# Altium PCB Tiva Control PCB.PcbDoc
Units mil, origin at the board's own origin, x right, y up, seen from the top; angles counter-clockwise.
Board outline 3135 x 1685 mil, 2 copper layers (Top Layer, Bottom Layer); 83 components, 55 nets, 280 pads, 67 vias.
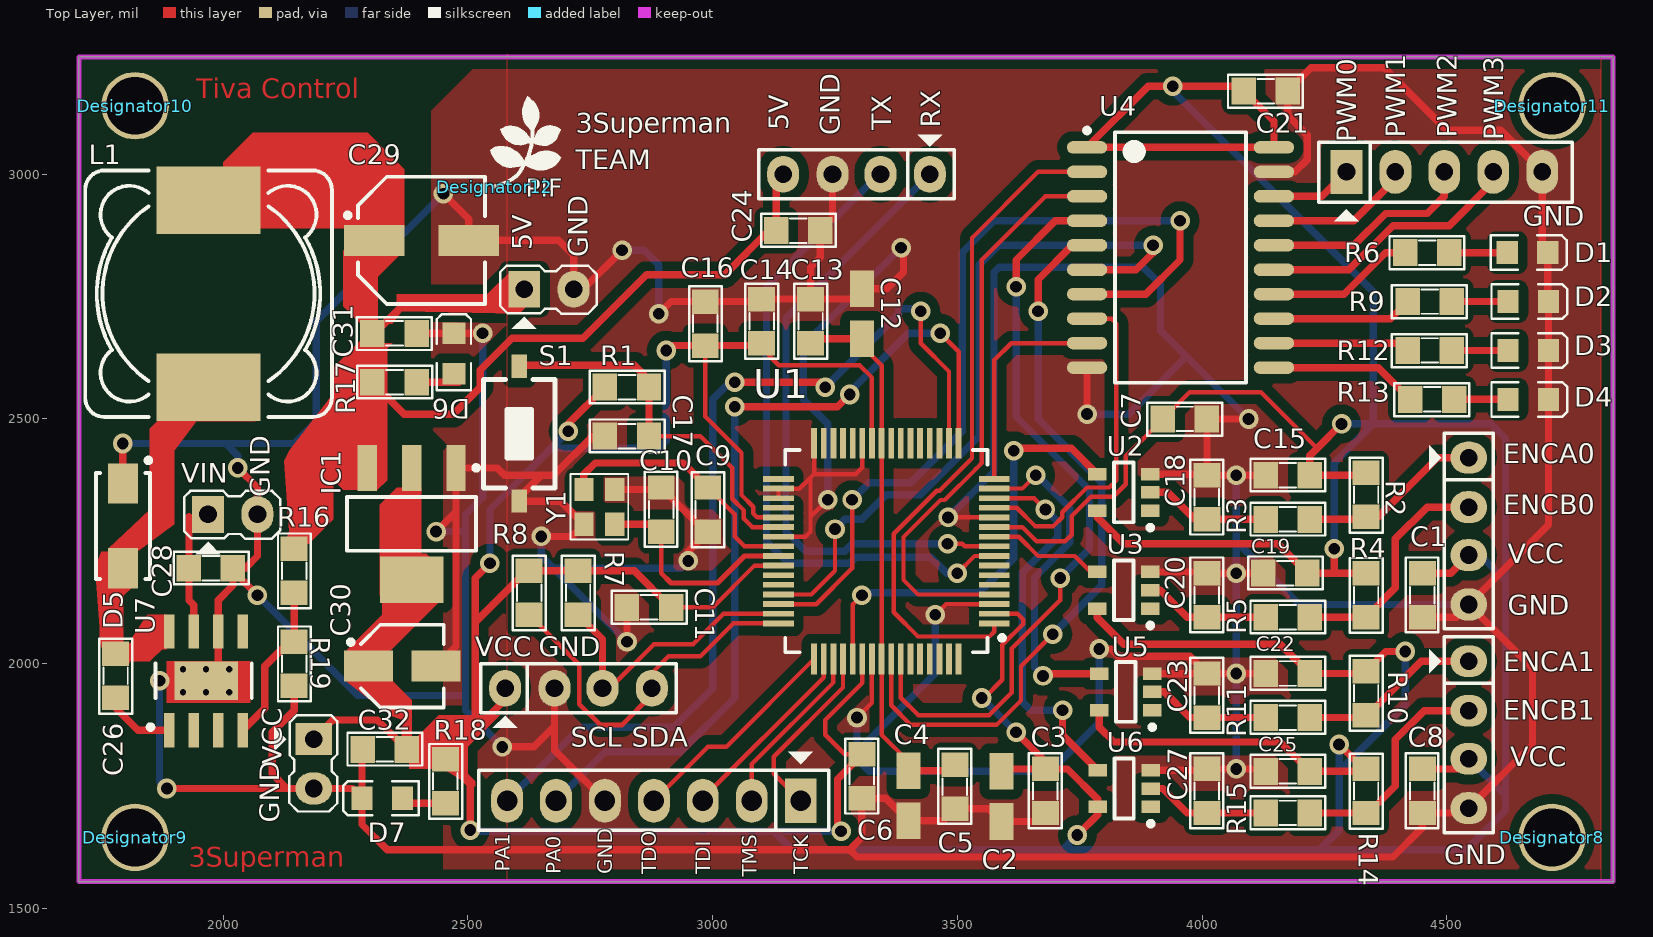
[diagram p0: Top Layer view]
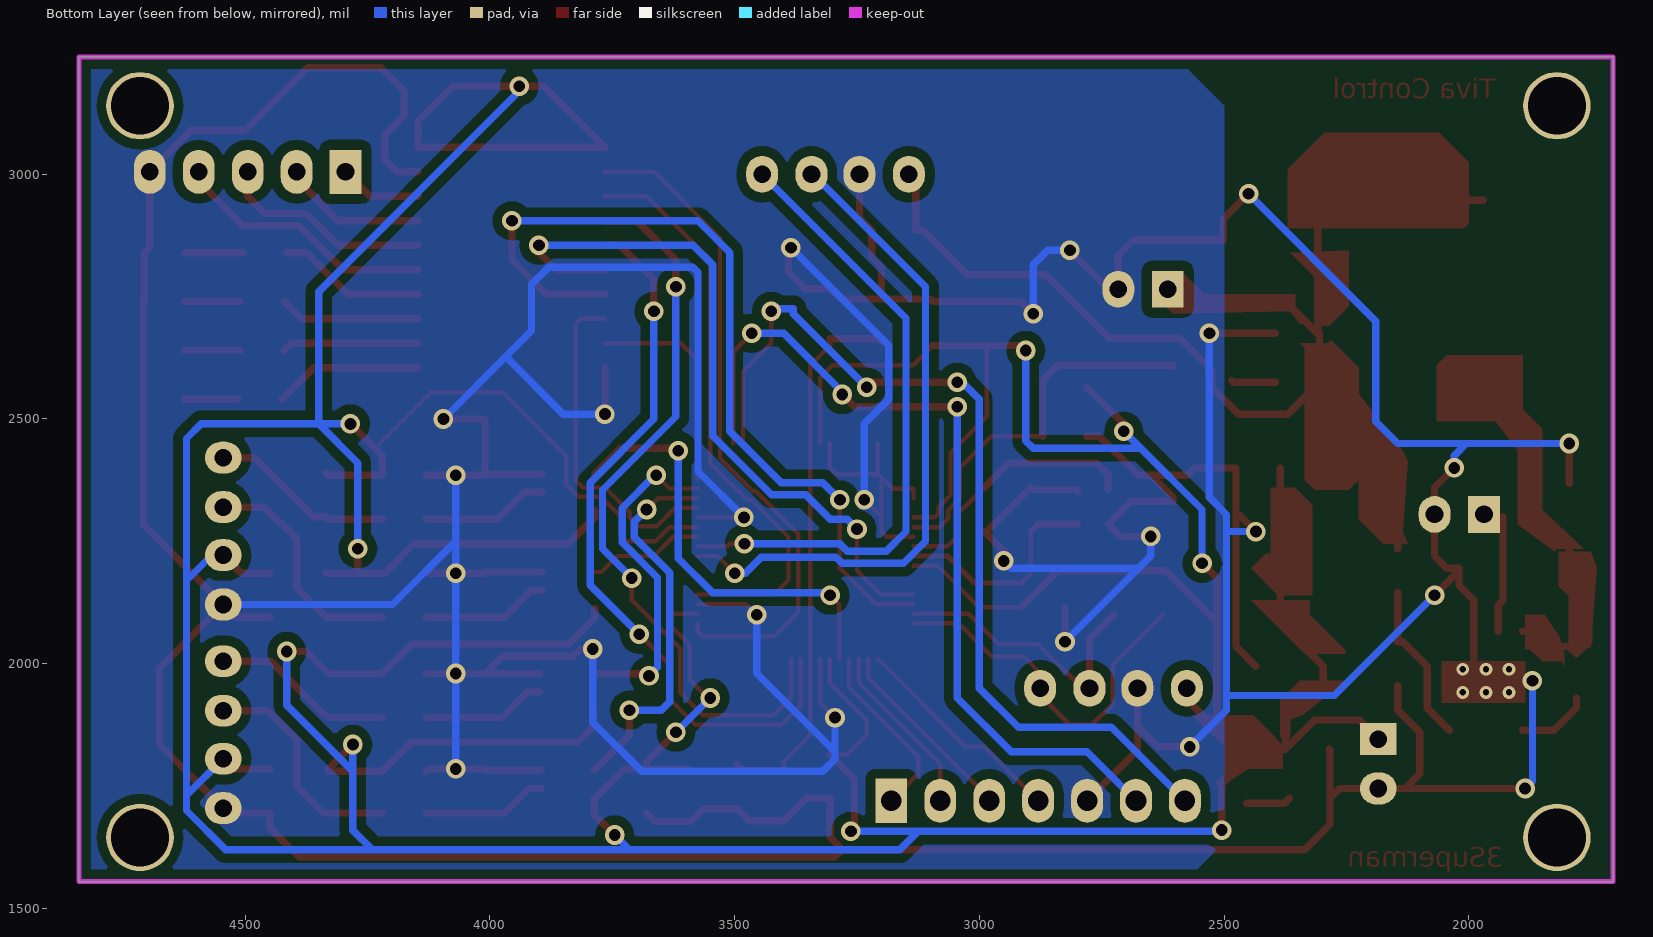
[diagram p1: Bottom Layer view, seen from below]
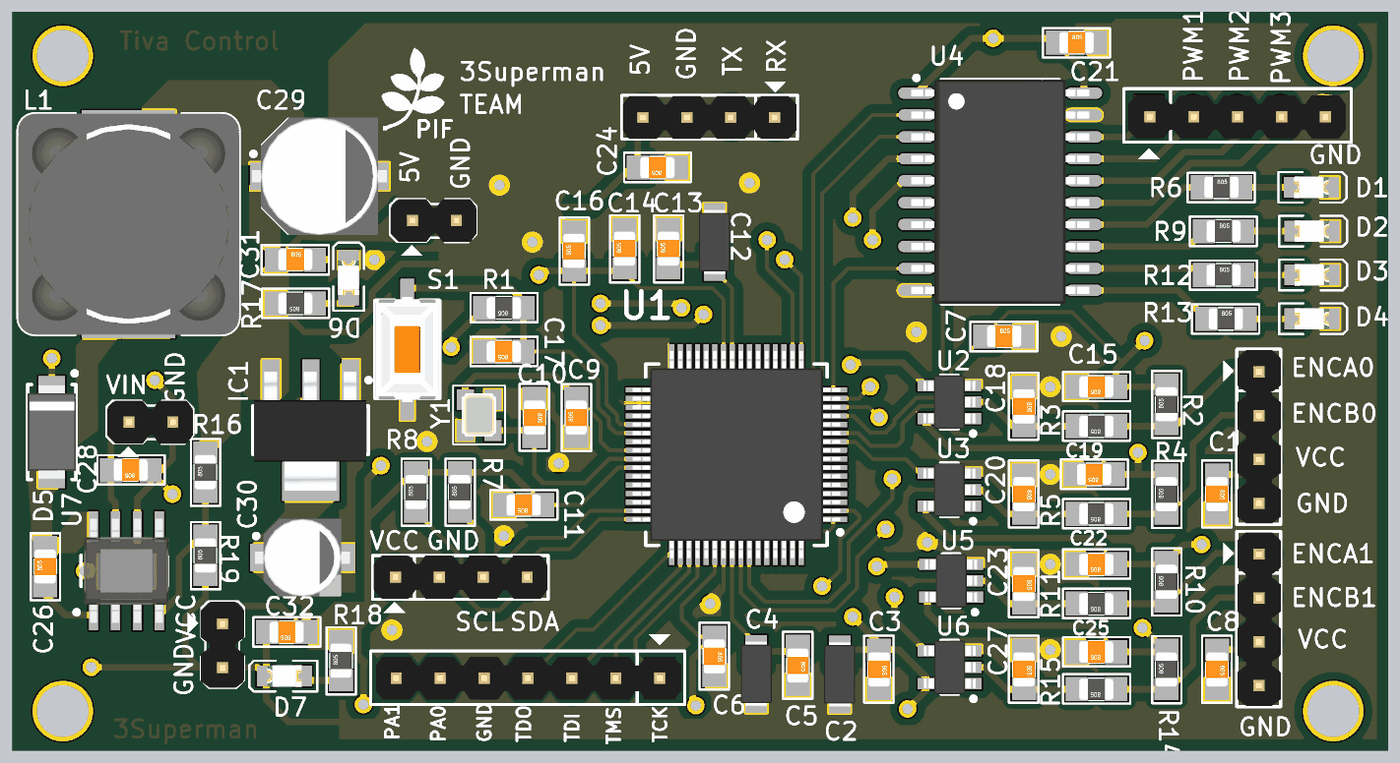
[diagram p2: 3D render of the assembled board from above, using the file's embedded part models]

## Layer stack, top to bottom
Top Solder: solder mask 0.4, Solder Resist, Dk 3.5
Top Layer: signal copper 1.4
Dielectric 1: dielectric 12.6, FR-4, Dk 4.8
Bottom Layer: signal copper 1.4
Bottom Solder: solder mask 0.4, Solder Resist, Dk 3.5

## Board outline
1705,1555 1705,3240 4840,3240 4840,1555

## Design rules (kind name [scope] priority, off if disabled: settings)
Clearance [All] p1: gap=10 ignorepadtopadclearanceinfootprint=FALSE except(0: Arc-Hole Track-Hole SMDPad-Hole THPad-Hole Via-Hole Fill-Hole Poly-Hole Region-Hole Text-Hole; 20: Arc-Poly Arc-Region Track-Poly Track-Region SMDPad-Poly SMDPad-Region THPad-Poly THPad-Region Via-Poly Via-Region Fill-Poly Fill-Region Poly-Poly Poly-Region Region-Region)
PlaneConnect [All] p1: planeconnectstyle=Direct reliefexpansion=20 reliefentries=4 reliefconductorwidth=10 reliefairgap=10
PolygonConnect [All] p1: connectstyle=Direct reliefconductorwidth=10 reliefentries=4 polygonreliefangle="90 Angle" airgapwidth=10
RoutingVias [All] p1: holewidth=50 width=100 viastyle="Through Hole" minholewidth=24 minwidth=40 maxholewidth=24 maxwidth=40
SolderMaskExpansion [All] p1: expansion=4
Width [All] p1: maxlimit=50 minlimit=8 preferedwidth=15 minimp=50.000000 maximp=50.000000 favimp=50.000000
29 further rules are at their usual default settings.

## Classes and differential pairs
component class "Tiva Control": 5V C1 C2 C3 C4 C5 C6 C7 C8 C9 C10 C11 C12 C13 C14 C15 C16 C17 C18 C19 C20 C21 C22 C23 C24 C25 C26 C27 C28 C30 C31 C32 D1 D2 D3 D4 D5 D6 D7 IC1 L1 PA1 PWM0 R1 R2 R3 R4 R5 R6 R7 R8 R9 R10 R11 R12 R13 R14 R15 R16 R17 R18 R19 SCL U1 U3 U4 U5 U6 U7 VCC VIN Y1 ""

## Components (designator, comment, footprint, x,y, rotation, side; value= is the part's Value field where it differs from the comment)
5V "Header 2" JP2 2615,2765 r0 top (schematic designator P8)
5V "Header 4" JP4 3344,3000 r180 top (schematic designator P5)
C1 "Cap Non-Pol SMD" CAP-SM-0805 4450,2185 r270 top value=104
C2 "Capacitors" "CAP TANTALUM SMD-1206" 3590,1728.82 r270 top
C3 "Cap Non-Pol SMD" CAP-SM-0805 3680,1785 r270 top value=104
C4 "Capacitors" "CAP TANTALUM SMD-1206" 3400,1730 r270 top
C5 "Cap Non-Pol SMD" CAP-SM-0805 3495,1793.93 r270 top value=104
C6 "Cap Non-Pol SMD" CAP-SM-0805 3305,1815 r270 top value=104
C7 "Cap Non-Pol SMD" CAP-SM-0805 3920,2500 r0 top value=104
C8 "Cap Non-Pol SMD" CAP-SM-0805 4450,1785 r270 top value=104
C9 "Cap Non-Pol SMD" CAP-SM-0805 2990,2270 r90 top value=10pF
C10 "Cap Non-Pol SMD" CAP-SM-0805 2895,2360 r270 top value=10pF
C11 "Cap Non-Pol SMD" CAP-SM-0805 2915,2115 r180 top value=104
C12 "Capacitors" "CAP TANTALUM SMD-1206" 3305,2715 r90 top
C13 "Cap Non-Pol SMD" CAP-SM-0805 3200,2655 r90 top value=104
C14 "Cap Non-Pol SMD" CAP-SM-0805 3100,2655 r90 top value=104
C15 "Cap Non-Pol SMD" CAP-SM-0805 4220,2385 r180 top value=104
C16 "Cap Non-Pol SMD" CAP-SM-0805 2985,2650 r90 top value=104
C17 "Cap Non-Pol SMD" CAP-SM-0805 2870,2465 r180 top value=104
C18 "Cap Non-Pol SMD" CAP-SM-0805 4010,2385 r270 top value=104
C19 "Cap Non-Pol SMD" CAP-SM-0805 4215,2185 r180 top value=104
C20 "Cap Non-Pol SMD" CAP-SM-0805 4010,2185 r270 top value=104
C21 "Cap Non-Pol SMD" CAP-SM-0805 4085,3170 r0 top value=104
C22 "Cap Non-Pol SMD" CAP-SM-0805 4220,1980 r180 top value=104
C23 "Cap Non-Pol SMD" CAP-SM-0805 4010,1980 r270 top value=104
C24 "Cap Non-Pol SMD" CAP-SM-0805 3220,2885 r180 top value=104
C25 "Cap Non-Pol SMD" CAP-SM-0805 4220,1780 r180 top value=104
C26 "Cap Non-Pol SMD" CAP-SM-0805 1780,1930 r90 top value=0.01u
C27 "Cap Non-Pol SMD" CAP-SM-0805 4010,1785 r270 top value=104
C28 "Cap Non-Pol SMD" CAP-SM-0805 2020,2195 r180 top value=10uF
C29 "Cap Pol SMD" "CAP ALU SIZE D" 2405,2865 r0 top value=220uF
C30 "Cap Pol SMD" "CAP ALU SIZE B" 2366.1,1995 r0 top value=22uF
C31 "Cap Non-Pol SMD" CAP-SM-0805 2305,2675 r0 top value=104
C32 "Cap Non-Pol SMD" CAP-SM-0805 2375,1825 r180 top value=104
D1 "LED SMD" LED_0805_Blue 4665,2840 r0 top
D2 "LED SMD" LED_0805_Blue 4666.34,2740 r0 top
D3 "LED SMD" LED_0805_Blue 4666.34,2640 r0 top
D4 "LED SMD" LED_0805_Blue 4666.34,2540 r0 top
D5 "SS34" SS34 1795,2281.61 r270 top
D6 "LED SMD" LED_0805_Blue 2471.34,2633.66 r90 top
D7 "LED SMD" LED_0805_Blue 2325,1725 r180 top
Designator8 "Comment" "LO KHOAN 3MM" 4715,1645 r0 top
Designator9 "Comment" "LO KHOAN 3MM" 1820,1645 r0 top
Designator10 "Comment" "LO KHOAN 3MM" 1820,3140 r0 top
Designator11 "Comment" "LO KHOAN 3MM" 4715,3140 r0 top
Designator12 "Comment" "PIF LOGO SMALL TOP" 2745,3164 r0 top
IC1 "LM1117" SOT223-4N 2385,2285.83 r270 top value=LM317
L1 "Inductor" "INDUCTOR 12.5x12.5" 1970,2755.94 r90 top value=200uH
PA1 "Header 7" JP7 3180,1720 r180 top (schematic designator P2)
PWM0 "Header 5" JP5 4295,3005 r0 top (schematic designator P3)
R1 "Res SMD" RES-SM-0805 2870,2565 r180 top value=10K
R2 "Res SMD" RES-SM-0805 4335,2300 r90 top value=2k7
R3 "Res SMD" RES-SM-0805 4220,2295 r180 top value=330R
R4 "Res SMD" RES-SM-0805 4335,2095 r90 top value=2k7
R5 "Res SMD" RES-SM-0805 4220,2095 r180 top value=330R
R6 "Res SMD" RES-SM-0805 4415,2840 r0 top value=330R
R7 "Res SMD" RES-SM-0805 2725,2100 r90 top value=4K7
R8 "Res SMD" RES-SM-0805 2625,2100 r90 top value=4K7
R9 "Res SMD" RES-SM-0805 4420,2740 r0 top value=330R
R10 "Res SMD" RES-SM-0805 4335,1895 r90 top value=2k7
R11 "Res SMD" RES-SM-0805 4220,1890 r180 top value=330R
R12 "Res SMD" RES-SM-0805 4420,2640 r0 top value=330R
R13 "Res SMD" RES-SM-0805 4425,2540 r0 top value=330R
R14 "Res SMD" RES-SM-0805 4335,1695 r90 top value=2k7
R15 "Res SMD" RES-SM-0805 4220,1695 r180 top value=330R
R16 "Res SMD" RES-SM-0805 2145,2145 r90 top value=10K
R17 "Res SMD" RES-SM-0805 2395,2575 r180 top value=1K
R18 "Res SMD" RES-SM-0805 2454,1715 r90 top value=1K
R19 "Res SMD" RES-SM-0805 2145,1955 r90 top value=3K3
S1 "SW" SW-SMD 2605,2470 r270 top
SCL "Header 4" JP4 2676,1950 r0 top (schematic designator P6)
U1 "TM4C123GH6PMI" S-PQFP-G64 3355,2230 r180 top
U2 "SN74LVC1G14" SOT23-5N 3840,2350 r180 top
U3 "SN74LVC1G14" SOT23-5N 3840,2150 r180 top
U4 "74HC245D" SOIC127P1030X265-20M 3955.94,2830 r0 top
U5 "SN74LVC1G14" SOT23-5N 3844.13,1942.4 r180 top
U6 "SN74LVC1G14" SOT23-5N 3840.87,1745 r180 top
U7 "TPS5430" DDA8 1965,1965 r90 top value=Value
VCC "Header 4" JP4 4545,1905 r270 top (schematic designator P4)
VCC "Header 4" JP4 4545,2321 r270 top (schematic designator P1)
VCC "Header 2" JP2 2185,1846 r270 top (schematic designator P9)
VIN "Header 2" JP2 1969,2305 r0 top (schematic designator P7)
Y1 "16MHz" "Crystal SMD 2.5X2.0" 2737.01,2355.87 r270 top

## Footprints (in the part's own frame and the unit in brackets; to place one, negate y for a bottom-side part, rotate by r counter-clockwise, add the part's x,y. Pads: shape width x height; smd on the part's side, far side on the other; paste and mask are expansions set on the pad)
"CAP ALU SIZE B" [mm] "Capacitor, Aluminium Electrolytric, 4.3mm L X 4.3mm W X 5.4mm H, IPC Medium Density"
  rect 2.55x1.6 smd: 1(-1.75,0) 2(1.75,0)
  silkscreen extent -2.8,-2.15 2.15,2.15, body extent -2.75,-2.25 2.75,2.25, height 5.7
"CAP ALU SIZE D" [mm] "Capacitor, Aluminium Electrolytric, 6.6mm L X 6.6mm W X 5.4mm H, IPC Medium Density"
  rect 3.15x1.6 smd: 1(-2.45,0) 2(2.45,0)
  silkscreen extent -3.95,-3.3 3.3,3.3, body extent -3.9,-3.4 3.9,3.4, height 5.7
"CAP TANTALUM SMD-1206" [mm] "Molded Capacitor, 2-Leads, Body 3.30x1.70mm, IPC Medium Density"
  rect 1.9x1.25 smd: 1(-1.3,0) 2(1.3,0)
  body extent -1.92,-0.9 1.92,0.9, height 1.6
CAP-SM-0805 [mil]
  rect 50x55 smd: 1(0,0) 2(90,0)
  silkscreen extent -32,-34 121,33, body extent 6,-25 84,25, height 31
"Crystal SMD 2.5X2.0" [mm]
  rect 1.2x1 smd: 1(0,0) 2(1.8,0) 3(1.8,1.6) 4(0,1.6)
  silkscreen extent -0.8,-0.7 2.6,2.3, body extent -0.35,-0.2 2.15,1.8, height 0.8
DDA8 [mil]
  rect 70x21 smd: 1(-101,75) 2(-101,25) 3(-101,-25) 4(-101,-75) 5(101,-75) 6(101,-25) 7(101,25) 8(101,75)
  rect 78.74x129.92 smd: 9(0,0)
  silkscreen extent -99,-93 35,118, body extent -119,-96 119,96, height 60
"INDUCTOR 12.5x12.5" [mm] "SMD Inductor  Body Width 12.5mm Body Lenght 12.5mm Height 8mm"
  rect 3.5x5.4 smd: 1(-4.85,0) 2(4.85,0)
  silkscreen extent -6.4,-6.4 6.4,6.4, body extent -6.4,-6.4 6.4,6.4, height 8
JP2 [mil]
  rect 65x75 hole 36: 1(0,0)
  oval 65x75 hole 36: 2(101,0)
  silkscreen extent -49,-81 148,48, body extent -48,-50 148,48, height 323
JP4 [mil] "Jumper 4"
  oval 65x75 hole 36: 1(-100,0) 2(1,0) 3(99,0) 4(200,0)
  silkscreen extent -150,-81 250,50, body extent -148,-48 248,50, height 323
JP5 [mil] "JP5"
  rect 65x90 hole 36: 1(0,0)
  oval 65x90 hole 36: 2(100,0) 3(200,0) 4(300,0) 5(400,0)
  silkscreen extent -57,-101 461,60, body extent -48,-53 448,45, height 323
JP7 [mil] "JP7"
  rect 65x90 hole 42: 1(0,0)
  oval 65x90 hole 42: 2(100,0) 3(200,0) 4(300,0) 5(400,0) 6(500,0) 7(600,0)
  silkscreen extent -57,-100 658,60, body extent -50,-49 646,49, height 323
LED_0805_Blue [mm] "Chip LED, 2-Leads, Body 2.0x1.3mm, IPC Medium Density"
  rect 1.1x1.2 smd: 1(-1.05,0) 2(1.05,0)
  silkscreen extent -1.91,-0.89 2.03,0.89, body extent -1,-0.63 1,0.62, height 0.68
"LO KHOAN 3MM" [mil]
  round 138 hole 118.1: 1(0,0)
"PIF LOGO SMALL TOP" [mil]
  rect 10x10 on Top Overlay: 1(-190,-189)
  silkscreen extent -199,-189 -55,-5
RES-SM-0805 [mil]
  rect 50x55 smd: 1(0,0) 2(90,0)
  silkscreen extent -32,-34 121,33, body extent 6,-25 84,25, height 31
S-PQFP-G64 [mm] "TSQFP, 64-Leads, Body 10.00x10.00mm, Pitch 0.50mm, IPC Low Density"
  rect 1.6x0.3 smd: 1(-5.6,3.75) 2(-5.6,3.25) 3(-5.6,2.75) 4(-5.6,2.25) 5(-5.6,1.75) 6(-5.6,1.25) 7(-5.6,0.75) 8(-5.6,0.25) 9(-5.6,-0.25) 10(-5.6,-0.75) 11(-5.6,-1.25) 12(-5.6,-1.75) 13(-5.6,-2.25) 14(-5.6,-2.75) 15(-5.6,-3.25) 16(-5.6,-3.75) 33(5.6,-3.75) 34(5.6,-3.25) 35(5.6,-2.75) 36(5.6,-2.25) 37(5.6,-1.75) 38(5.6,-1.25) 39(5.6,-0.75) 40(5.6,-0.25) 41(5.6,0.25) 42(5.6,0.75) 43(5.6,1.25) 44(5.6,1.75) 45(5.6,2.25) 46(5.6,2.75) 47(5.6,3.25) 48(5.6,3.75)
  rect 0.3x1.6 smd: 17(-3.75,-5.6) 18(-3.25,-5.6) 19(-2.75,-5.6) 20(-2.25,-5.6) 21(-1.75,-5.6) 22(-1.25,-5.6) 23(-0.75,-5.6) 24(-0.25,-5.6) 25(0.25,-5.6) 26(0.75,-5.6) 27(1.25,-5.6) 28(1.75,-5.6) 29(2.25,-5.6) 30(2.75,-5.6) 31(3.25,-5.6) 32(3.75,-5.6) 49(3.75,5.6) 50(3.25,5.6) 51(2.75,5.6) 52(2.25,5.6) 53(1.75,5.6) 54(1.25,5.6) 55(0.75,5.6) 56(0.25,5.6) 57(-0.25,5.6) 58(-0.75,5.6) 59(-1.25,5.6) 60(-1.75,5.6) 61(-2.25,5.6) 62(-2.75,5.6) 63(-3.25,5.6) 64(-3.75,5.6)
  silkscreen extent -6.13,-5.25 5.25,5.25, body extent -6,-6 6,6, height 1.6
SOIC127P1030X265-20M [mm] "SOIC, 20-Leads, Body 12.80x7.50mm, Pitch 1.27mm, IPC Low Density"
  oval 2.1x0.65 smd: 1(-4.85,5.715) 2(-4.85,4.445) 3(-4.85,3.175) 4(-4.85,1.905) 5(-4.85,0.635) 6(-4.85,-0.635) 7(-4.85,-1.905) 8(-4.85,-3.175) 9(-4.85,-4.445) 10(-4.85,-5.715) 11(4.85,-5.715) 12(4.85,-4.445) 13(4.85,-3.175) 14(4.85,-1.905) 15(4.85,-0.635) 16(4.85,0.635) 17(4.85,1.905) 18(4.85,3.175) 19(4.85,4.445) 20(4.85,5.715)
  silkscreen extent -4.97,-6.5 3.4,6.71, body extent -5.15,-6.5 5.15,6.5, height 2.65
SOT23-5N [mm] "SOT23, 5-Leads, Body 2.90x2.80mm, Pitch 0.95mm"
  rect 0.95x0.65 smd: 1(-1.375,0.95) 2(-1.375,0) 3(-1.375,-0.95) 4(1.375,-0.95) 5(1.375,0.95)
  silkscreen extent -1.5,-1.55 0.5,1.95, body extent -1.5,-1.55 1.5,1.55, height 1
SOT223-4N [mm] "SOT223, 4-Leads, Body 6.5x3.5mm, Pitch 2.3mm, Lead Span 7mm, IPC Medium Density"
  rect 2.4x1 smd: 1(-2.9,2.3) 2(-2.9,0) 3(-2.9,-2.3)
  rect 2.4x3.3 smd: 4(2.9,0)
  silkscreen extent -3.02,-3.35 1.4,3.48, body extent -3.39,-3.27 3.5,3.23, height 1.72
SS34 [mm] "DO-214-AC/SMA Molded Diode, Body 5.3x2.6mm, IPC Medium Density"
  rect 2.1x1.55 smd: 1(-2.2,0) 2(2.2,0)
  silkscreen extent -3.52,-1.4 2.75,1.45, body extent -2.75,-1.4 2.75,1.4, height 2.3
SW-SMD [mm] "Switch SMD type"
  rect 1.2x0.8 smd: 1(-3.5,0) 2(3.5,0)
  silkscreen extent -2.82,-1.85 2.82,1.85, body extent -3.05,-1.85 3.05,1.85, height 2.5

## Part data
5V VCC VIN: "Header, 2-Pin", LatestRevisionDate=17-Jul-2002, LatestRevisionNote="Re-released for DXP Platform.", Publisher="Altium Limited"
5V SCL VCC VCC: "Header, 4-Pin", LatestRevisionDate=17-Jul-2002, LatestRevisionNote="Re-released for DXP Platform.", Publisher="Altium Limited"
C1 C3 C5 C6 C7 C8 C9 C10 C11 C13 C14 C15 C16 C17 C18 C19 C20 C21 C22 C23 C24 C25 C26 C27 C28 C31 C32: "Capacitor"
C2 C4: library part "Cap Pol Tantalum", "Capacitors Tantalum", Capacitance=1uF/16V, ESR (Equivalent Series Resistance)="3.8 Ohm", Lifetime @ Temp.="2000 Hrs @ 85°C", Manufacturer=Kemet, Manufacturer Part Number=T491A106K010AT, Manufacturer Size Code=A, Operating Temperature="-55°C ~ 125°C", Package / Case="1206 (3216 Metric)", Tolerance=±10%, Voltage - Rated=10V, Category=Capacitors, ComponentLink1Description=http://www.kemet.com/Lists/ProductCatalog/Attachments/254/KEM_T2005_T491.pdf, ComponentLink1URL=http://www.kemet.com/Lists/ProductCatalog/Attachments/254/KEM_T2005_T491.pdf, Features="General Purpose", Height - Seated (Max)="0.071\" (1.80mm)", Lead Spacing=-, Mounting Type="Surface Mount", Packaging="Tape & Reel (TR)", Part Status=Active, Pricing 1="2000=0.0626, 4000=0.05791, 10000=0.05478, 14000=0.05196, 50000=0.04695, 100000=0.04147 (USD)", RoHS="RoHS Compliant", Size / Dimension="0.126\" L x 0.063\" W (3.20mm x 1.60mm)", Stock 1=316000, Supplier 1=Digi-Key, Type=Molded
C12: library part "Cap Pol Tantalum", "Capacitors Tantalum", Capacitance=2.2uF/16V, ESR (Equivalent Series Resistance)="3.8 Ohm", Lifetime @ Temp.="2000 Hrs @ 85°C", Manufacturer=Kemet, Manufacturer Part Number=T491A106K010AT, Manufacturer Size Code=A, Operating Temperature="-55°C ~ 125°C", Package / Case="1206 (3216 Metric)", Tolerance=±10%, Voltage - Rated=10V, Category=Capacitors, ComponentLink1Description=http://www.kemet.com/Lists/ProductCatalog/Attachments/254/KEM_T2005_T491.pdf, ComponentLink1URL=http://www.kemet.com/Lists/ProductCatalog/Attachments/254/KEM_T2005_T491.pdf, Features="General Purpose", Height - Seated (Max)="0.071\" (1.80mm)", Lead Spacing=-, Mounting Type="Surface Mount", Packaging="Tape & Reel (TR)", Part Status=Active, Pricing 1="2000=0.0626, 4000=0.05791, 10000=0.05478, 14000=0.05196, 50000=0.04695, 100000=0.04147 (USD)", RoHS="RoHS Compliant", Size / Dimension="0.126\" L x 0.063\" W (3.20mm x 1.60mm)", Stock 1=316000, Supplier 1=Digi-Key, Type=Molded
C29 C30: "Polarized Capacitor (Radial)"
D1 D2 D3 D4 D6 D7: "LED"
D5: library part "D Schottky", "Schottky Diode", Code_JEDEC=DO-214-AA, LatestRevisionDate=17-Jul-2002, LatestRevisionNote="Re-released for DXP Platform.", PackageDescription="DO-214-AA/SMB; 2 C-Bend Leads; Body 5.3 x 3.6 mm, inc. leads (LxW)", PackageReference=SMB, Published=8-Jun-2000, Publisher="Altium Limited"
IC1: "Available in 1.8V, 2.5V, 2.85V, 3.3V, 5V, and  Adjustable Versions"
PA1: "Header, 7-Pin", LatestRevisionDate=17-Jul-2002, LatestRevisionNote="Re-released for DXP Platform.", Publisher="Altium Limited"
PWM0: "Header, 5-Pin", LatestRevisionDate=17-Jul-2002, LatestRevisionNote="Re-released for DXP Platform.", Publisher="Altium Limited"
R1 R2 R3 R4 R5 R6 R7 R8 R9 R10 R11 R12 R13 R14 R15 R16 R17 R18 R19: "Resistor"
S1: library part "Tact SW - 2Pin", "Switch button 2 pin"
U1: "TEXAS INSTRUMENTS - TM4C123GH6PMI - 32 Bit Microcontroller, Tiva, ARM Cortex-M4F, 80 MHz, 256 KB, 32 KB, 64, LQFP", Manufacturer="TEXAS INSTRUMENTS", Supplier Part Number 1=67X4763, ComponentLink1Description=http://www.farnell.com/datasheets/1826106.pdf, ComponentLink1URL=http://www.farnell.com/datasheets/1826106.pdf, Pricing 1="1=11.85, 10=10.71, 25=9.91, 50=9.46, 100=8.86, 250=8.47, 500=7.72, 1000=6.23 (USD)", RoHS=YES, Stock 1=135, Supplier 1=Newark
U7: "PMIC - Voltage Regulators - DC DC Switching Regulators", Manufacturer="Texas Instruments", Manufacturer_Part_Number=tps5430-ep_dda_8, PACKAGE_DESIGNATOR=DDA, Datasheet URL=http://www.ti.com/lit/gpn/TPS5430-EP, FAMILY_NAME="STEP-DOWN REGULATOR", GENERIC_PART_NUMBER=TPS5430-EP, INDUSTRY_STD_PKG_TYPE="SO PowerPAD", PIN_COUNT=8, RefDes=RefDes, Type=DEV, Vendor="Texas Instruments"
Y1: library part "XTAL 4Pin SMD", "Crystal For all Crystal 2pin"

## Via types
v1: diameter 40, hole 24, Top Layer to Bottom Layer, 61 vias
v2: diameter 25.98, hole 12.99, Top Layer to Bottom Layer, tented top, 6 vias

## Nets (pads, with @x,y where several pads share a name; then routed paths per layer and width w, separated by ;. In a path a pad name is that pad's centre, name@x,y a point inside that pad or via, vN(x,y) a via of type N, cw(c..) or ccw(c..) an arc to the next point about the centre after c; other vN are vias at no path point)
5V: 5V.1@2615,2765 5V.4 C24.2 C29.1 C31.1 IC1.3 L1.2 R16.2 R17.2 | length 2763
  Top Layer w15: L1.2 2256.65,2946.89 2308.54,2895 C29.1 2308.54,2678.54 C31.1 ; R16.2 2145,2415 R17.2 ; IC1.3 2294.45,2489.45 2305,2500 R17.2 ; 5V.1@2615,2765 2585,2765 2550,2730 2365,2730 2310,2675 C31.1 ; 5V.4 3130,2986 C24.2 3115,2885 3025,2795 2865,2795 2735,2665 2590,2665 2525,2600 2525,2565 2470,2510 2370,2510 R17.2 ; R17.2 C31.1
7.4V: C28.2 U7.7 VIN.1 | length 238.1
  Top Layer w15: 1930,2300 C28.2 1930,2130 1940,2120 U7.7
A0: R2.1 R3.1 VCC.1@4545,2421 | length 377.2
  Top Layer w15: R3.1 4330,2295 R2.1 4360,2300 4481,2421 VCC.1@4545,2421
A1: R10.1 R11.1 VCC.1@4545,2005 | length 372.6
  Top Layer w15: R11.1 4330,1890 R10.1 4338.03,1895 4448.03,2005 VCC.1@4545,2005
B0: R4.1 R5.1 VCC.2@4545,2320 | length 476.8
  Top Layer w15: R5.1 R4.1 4395,2155 4395,2255 4460,2320 VCC.2@4545,2320
B1: R14.1 R15.1 VCC.2@4545,1904 | length 467.2
  Top Layer w15: R15.1 R14.1 4340,1695 4395,1750 4395,1845 4454,1904 VCC.2@4545,1904
DEBUG_TCK: PA1.1 U1.52 | length 370.9
  Top Layer w9: PA1.1 3125,1775 3125,1810 3266.42,1951.42 U1.52
DEBUG_TDI: PA1.3 U1.50 | length 391.9
  Top Layer w9: PA1.3 2980,1725 3227.05,1972.05 U1.50
DEBUG_TDO: PA1.4 U1.49 | length 447.3
  Top Layer w9: PA1.4 2990,1830 3027.83,1830 U1.49
DEBUG_TMS: PA1.2 U1.51 | length 358.6
  Top Layer w9: PA1.2 3080,1795 3246.73,1961.73 U1.51
GND: 5V.2@2716,2765 5V.3 C1.2 C2.2 C3.2 C4.2 C5.2 C6.2 C7.2 C8.2 C9.1 C10.1 C11.2 C12.2 C13.2 C14.2 C15.2 C16.2 C17.2 C18.1 C19.2 C20.1 C21.2 C22.2 C23.1 C24.1 C25.2 C27.1 C28.1 C29.2 C30.2 C31.2 C32.2 D1.2 D2.2 D3.2 D4.2 D5.1 D6.2 D7.2 IC1.1 PA1.5 PWM0.5 R19.1 S1.2 SCL.2 U1.3 U1.12 U1.27 U1.32 U1.34 U1.35 U1.39 U1.55 U2.3 U3.3 U4.10 U4.19 U5.3 U6.3 U7.6 U7.9 VCC.2@2185,1745 VCC.4 VIN.2 Y1.2 Y1.4 | length 20599.8
  Top Layer w9: U1.39 3189.53,2259.53 3200,2270 3200,2300 ; U1.35 3134.53,2357.23 3177.23,2357.23 3200,2380 ; U1.32 3207.36,2387.36 ; v1(3235,2335) 3200,2300 ; v1(3295,1890) 3325.47,1920.47 U1.55 ; U1.27 3305.79,2400.79 3292.36,2387.36 3207.36,2387.36 ; v1(3455,2100) 3476.73,2121.73 U1.3 ; v1(3481.1,2298.9) U1.12 ; 3200,2300 3200,2380 ; 3200,2380 3207.36,2387.36
  Top Layer w15: D5.1 v1(1795,2450) ; v1(1870,1965) U7.9 1990,1990 U7.6 1990,2130 2020,2160 C28.1@2020,2190 ; v1(1885,1745) 2130,1745 ; v1(2030,2400) 2070,2360 VIN.2 2070,2220 2045,2195 C28.1 C28.1@2020,2190 ; v1(2070,2140) C28.1@2020,2190 ; R19.1 2145,1905 2100,1860 2100,1775 2130,1745 ; C32.2 2283.66,1823.66 D7.2 ; C31.2 D6.2 v1(2530,2675) ; C30.2 2475.55,2035.55 2475.55,2310 ; v1(2435,2270) 2475,2310 2475.55,2310 ; v1(2450,2960) 2501.46,2908.54 C29.2 2685,2865 2716,2834 2716,2765 2735,2765 v1(2815,2845) ; v1(2570,1830) 2635,1830 2677,1872 ; v1(2650,2260) 2712.01,2260 Y1.2 2689.8,2332.2 S1.2 2605,2340 2650,2385 ; SCL.2 2677,1872 ; PA1.5 2677,1823 2677,1872 ; C17.2 2755,2465 2675,2385 2650,2385 ; Y1.4@2800,2351.12 Y1.4 2890.87,2355.87 C10.1 2985,2270 C9.1 2950,2230 v1(2950,2210) ; v1(2825,2045) C11.2 ; v1(2890,2715) 2915,2740 C16.2 3095,2740 C14.2 C13.2 ; 5V.3 3245,2910 C24.1 3220,2830 3200,2810 C13.2 ; v1(3385,2850) 3390,2845 3390,2800 3356.18,2766.18 C12.2 3283.82,2745 C13.2 ; C3.2 3662.64,1677.64 C2.2 3563.71,1703.93 C5.2 3469.89,1678.82 C4.2 3353.82,1725 C6.2 3305,1645 3280,1620 ; v1(3765,2510) U4.10 ; v1(3790,2030) 3814.64,2030 3829.64,2015 3974.61,2015 C23.1@4009.8,1979.8 ; U3.3 4007.6,2187.4 C20.1 v1(4070,2185) C19.2 ; U2.3 C18.1@4007.6,2387.4 ; U6.3 4007.4,1782.4 C27.1 v1(4070,1785) 4125,1785 C25.2 ; U5.3 C23.1@4009.8,1979.8 ; v1(4095,2500) C7.2 4010,2389.8 C18.1@4007.6,2387.4 ; C22.2 v1(4070,1980) C23.1 C23.1@4009.8,1979.8 ; C15.2 v1(4070,2385) C18.1 C18.1@4007.6,2387.4 ; U4.19 4190,3005 4215,3030 4215,3080 4175,3120 C21.2 4222.5,3217.5 4372.5,3217.5 4500,3090 4610,3090 PWM0.5 4695,2851.34 D1.2 4706.34,2741.34 D2.2 D3.2 D4.2 4707.68,2283.68 VCC.4@4545,2121 ; C1.2 4519,2095 VCC.4@4545,2121 ; 2130,1745 2185,1745 2263.66,1745 D7.2 ; D7.2 2283.66,1671.34 2335,1620 3280,1620 ; 2475.55,2310 IC1.1 2560,2400 2575,2385 2650,2385 ; 3280,1620 3295,1605 4390,1605 4450,1665 C8.2 4535,1695 4545,1705 4675,1835 4675,1991 VCC.4@4545,2121
  Bottom Layer w15: v1(1795,2450) 2005,2450 ; v1(1870,1965) 1870,1760 v1(1885,1745) ; v1(2030,2400) 2030,2425 2005,2450 ; v1(2070,2140) 2275,1935 2495,1935 ; v1(2435,2270) 2495,2270 ; v1(2450,2960) 2190,2700 2190,2495 2145,2450 2005,2450 ; v1(2530,2675) 2530,2340 2495,2305 2495,2270 ; v1(2570,1830) 2495,1905 2495,1935 ; v1(2650,2260) 2650,2220 2675,2195 ; v1(2815,2845) 2860,2845 2890,2815 v1(2890,2715) ; v1(2825,2045) 2675,2195 ; v1(2950,2210) 2935,2195 2675,2195 ; v1(3235,2335) 3235,2490 3185,2540 3185,2650 v1(3385,2850) ; v1(3295,1890) 3295,1820 ; v1(3455,2100) 3455,1980 3295,1820 ; v1(3481.1,2298.9) 3575,2392.8 3575,2800 3585,2810 3880,2810 3915,2775 3915,2680 3965,2630 ; v1(3765,2510) 3850,2510 3965,2625 3965,2630 ; v1(3790,2030) 3790,1880 3690,1780 3320,1780 3295,1805 3295,1820 ; v1(4070,1785) v1(4070,1980) v1(4070,2185) 4070,2250 ; v1(4070,2385) 4070,2250 ; v1(4095,2500) 3965,2630 ; VCC.4@4545,2121 4199,2121 4070,2250 ; 2495,1935 2495,2270
  other v2: 1917.76,1941.38 1965,1941.38 2012.24,1941.38 1917.76,1988.62 1965,1988.62 2012.24,1988.62
LDDISP0: R6.1 U4.14 | length 303.3
  Top Layer w15: U4.14 4290,2755 4375,2840 R6.1
LDDISP1: R9.1 U4.13 | length 287.6
  Top Layer w15: U4.13 4385,2705 R9.1
LDDISP2: R12.1 U4.12 | length 279.3
  Top Layer w15: U4.12 4405,2655 R12.1
LDDISP3: R13.1 U4.11 | length 305
  Top Layer w15: U4.11 4360,2605 R13.1
NetC18_2: C18.2 R3.2 U2.2 | length 258.6
  Top Layer w15: U2.2 3930,2350 3985,2295 C18.2 R3.2
NetC20_2: C20.2 R5.2 U3.2 | length 258.6
  Top Layer w15: U3.2 3915,2150 3970,2095 C20.2 R5.2
NetC23_2: C23.2 R11.2 U5.2 | length 253.4
  Top Layer w15: U5.2 3922.6,1942.4 3975,1890 C23.2 R11.2
NetC26_1: C26.1 U7.1 | length 149.1
  Top Layer w15: C26.1 1780,1910 1826,1864 U7.1
NetC26_2: C26.2 D5.2 L1.1 U7.8 | length 773.5
  Top Layer w15: U7.8 1876,2066 1845,2035 1795,2035 C26.2 1755,2045 1755,2155 D5.2 1795,2245 1865,2315 1865,2460 L1.1
NetC27_2: C27.2 R15.2 U6.2 | length 255.7
  Top Layer w15: U6.2 3920,1745 3970,1695 C27.2 R15.2
NetD1_1: D1.1 R6.2 | length 118.7
  Top Layer w15: R6.2 D1.1
NetD2_1: D2.1 R9.2 | length 115
  Top Layer w15: R9.2 D2.1
NetD3_1: D3.1 R12.2 | length 115
  Top Layer w15: R12.2 D3.1
NetD4_1: D4.1 R13.2 | length 110
  Top Layer w15: R13.2 D4.1
NetD6_1: D6.1 R17.1 | length 91.5
  Top Layer w15: R17.1 2481.34,2575 D6.1@2485,2578.66
NetD7_1: D7.1 R18.1 | length 91.8
  Top Layer w15: D7.1 2376.34,1715 R18.1
NetR16_1: R16.1 R19.2 U7.4 | length 330.4
  Top Layer w15: U7.4 2085,1909 2085,1995 2135,2045 R19.2 R16.1
OSC0: C9.2 U1.40 Y1.1 | length 535
  Top Layer w9: C9.2 3045,2305 3045,2260 3065.16,2239.84 U1.40
  Top Layer w15: Y1.1 2737.01,2387.01 2760,2410 2940,2410 C9.2
OSC1: C10.2 U1.41 Y1.3 | length 456.9
  Top Layer w10: C10.2 2895,2185 2915,2165 3010,2165 3065.16,2220.16 U1.41
  Top Layer w12: C10.2@2880,2285 C10.2
  Top Layer w15: Y1.3 C10.2@2880,2285
PA0/U0RX_VCP_TXD: PA1.6 U1.17 | length 1772.2
  Top Layer w9: v1(3465,2675) 3502.64,2637.36 U1.17
  Top Layer w15: v1(3045,2525) 3255,2525 v1(3280,2550)
  Bottom Layer w15: PA1.6 2780,1820 2935,1820 3045,1930 v1(3045,2525) ; v1(3280,2550) 3280,2555 3400,2675 v1(3465,2675)
PA1/U0TX_VCP_RXD: PA1.7 U1.18 | length 1916.6
  Top Layer w9: v1(3425,2720) 3425,2655 3482.95,2597.05 U1.18
  Top Layer w15: v1(3045,2575) 3220,2575 v1(3230,2565)
  Bottom Layer w15: PA1.7 2730,1870 2920,1870 3000,1950 3000,2540 3035,2575 v1(3045,2575) ; v1(3230,2565) 3380,2715 3380,2725 3420,2725 v1(3425,2720)
PB0_LDDISP0: U1.45 U4.6 | length 1480.2
  Top Layer w9: U1.45 3201.42,2141.42 3250,2190 v1(3250,2275)
  Top Layer w15: U4.6 3865,2805 3900,2840 v1(3900,2855)
  Bottom Layer w15: v1(3250,2275) 3270,2295 3305,2295 3355,2345 3424.64,2345 3545,2465.36 3545,2815 3585,2855 v1(3900,2855)
PB1_LDDISP1: U1.46 U4.7 | length 1739.7
  Top Layer w9: U1.46 3211.73,2121.73 3285,2195 v1(3285,2335)
  Top Layer w15: U4.7 3885,2755 3955,2825 v1(3955,2905)
  Bottom Layer w15: v1(3285,2335) 3320,2370 3405,2370 3510,2475 3510,2840 3575,2905 v1(3955,2905)
PB2_I2C0SCL: R7.1 SCL.3 U1.47 | length 593.2
  Top Layer w9: SCL.3 2790,1950 2880,2040 2960,2040 3022.05,2102.05 U1.47
  Top Layer w15: R7.1 2775,2050 SCL.3
PB3_I2C0SDA: R8.1 SCL.4 U1.48 | length 761.8
  Top Layer w9: SCL.4 2876,1981 2910,2015 2975,2015 3042.36,2082.36 U1.48
  Top Layer w10: R8.1 2727.5,1997.5 2727.5,1917.5 2770,1875 2815,1875 2876,1936 SCL.4
PB4_PWM2: U1.58 U4.4 | length 1529.4
  Top Layer w9: U1.58 3384.53,1930.47 3420,1895 3565,1895 3611,1941 3611,2031 3710,2130 v1(3710,2175)
  Top Layer w15: v1(3620,2770) 3620,2825 3700,2905 U4.4
  Bottom Layer w15: v1(3620,2770) 3620,2505 3770,2355 3770,2235 v1(3710,2175)
PB5_PWM3: U1.57 U4.5 | length 1508.1
  Top Layer w9: U1.57 3364.84,1915.16 3405,1875 3580,1875 3630,1925 3630,1995 v1(3695,2060)
  Top Layer w15: v1(3665,2720) 3665,2785 3735,2855 U4.5
  Bottom Layer w15: v1(3665,2720) 3665,2500 3795,2370 3795,2160 v1(3695,2060)
PB6_PWM0: U1.1 U4.2 | length 1372.5
  Top Layer w9: U1.1 3575.47,2065.47 3565.52,2055.52 3419.48,2055.52 3370,2105 3370,2265.66 3457.84,2353.5 3463.57,2353.5 3530,2419.93 3530,2870 3665,3005 U4.2
PB7_PWM1: U1.4 U4.3 | length 1191.9
  Top Layer w9: U1.4 3419.79,2141.42 3390,2171.21 3390,2258.79 3465.71,2334.5 3474.43,2334.5 3537.97,2398.04 3538.04,2398.04 3550,2410 3550,2825 3680,2955 U4.3
PC4_LDDISP3: U1.16 U4.9 | length 446.7
  Top Layer w9: U1.16 3575.47,2620.47 3610,2655 U4.9
PC5_ENC_A1: U1.15 U5.4 | length 690.8
  Top Layer w9: U1.15 3632.95,2357.95 v1(3660,2385)
  Top Layer w15: v1(3675,1975) 3679.8,1979.8 U5.4
  Bottom Layer w15: v1(3660,2385) 3663.03,2385 3730,2318.03 3730,2248.03 3657.5,2175.53 3657.5,1992.5 v1(3675,1975)
PC6_ENC_B1: U1.14 U6.4 | length 789.8
  Top Layer w9: U1.14 3656.73,2338.27 v1(3680,2315)
  Top Layer w15: v1(3715,1905) 3715,1855.87 3714.13,1855 U6.4
  Bottom Layer w15: v1(3680,2315) 3705,2290 3705,2258.39 3632.5,2185.89 3632.5,1922.5 3650,1905 v1(3715,1905)
PC7_LDDISP2: U1.13 U4.8 | length 694.7
  Top Layer w9: U1.13 3621.42,2318.58 3659.5,2280.5 3695.5,2280.5 3714.5,2299.5 3714.5,2309.5 3765.11,2360.11 3810.57,2360.11 3825,2374.53 3825,2695 3815,2705 U4.8
PD6_ENC_A0: U1.53 U2.4 | length 894.1
  Top Layer w9: U1.53 3286.1,2121.1 v1(3305,2140)
  Top Layer w15: v1(3615,2435) 3620,2440 3733.27,2440 U2.4
  Bottom Layer w15: v1(3305,2140) 3310,2145 3545,2145 3615,2215 v1(3615,2435)
PD7_ENC_B0: U1.10 U3.4 | length 240.3
  Top Layer w9: U1.10 3625.47,2259.53 3665,2220 3740,2220 3772.6,2187.4 U3.4
PE0_RX: 5V.1@3444,3000 U1.9 | length 1302.2
  Top Layer w9: v1(3480,2245) 3510,2245 3515.16,2239.84 U1.9
  Bottom Layer w9: v1@3470,2245 v1(3480,2245)
  Bottom Layer w15: 5V.1@3444,3000 3150,2706 3150,2270 3190,2230 3270,2230 3285,2245 v1@3470,2245
PE1_TX: 5V.2@3343,3000 U1.8 | length 1365.6
  Top Layer w9: v1(3500,2185) 3535.16,2220.16 U1.8
  Bottom Layer w15: 5V.2@3343,3000 3340,3000 3110,2770 3110,2250 3155,2205 3280.36,2205 3292.86,2217.5 3445.53,2217.5 3478.03,2185 v1(3500,2185)
PWM0: PWM0.1 U4.18 | length 201.7
  Top Layer w15: U4.18 4245,2955 4290,3000 PWM0.1@4290,3040
PWM1: PWM0.2 U4.17 | length 298.3
  Top Layer w15: U4.17 4310,2905 4395,2990 PWM0.2
PWM2: PWM0.3 U4.16 | length 439.5
  Top Layer w15: U4.16 4310,2855 4375,2920 4460,2920 4495,2955 PWM0.3
PWM3: PWM0.4 U4.15 | length 575.6
  Top Layer w15: U4.15 4300,2805 4390,2895 4505,2895 4590,2980 PWM0.4@4590,3040
RESET: C17.1 R1.1 S1.1 U1.38 | length 783
  Top Layer w9: C17.1 2975,2465 3040,2400 3040,2336.87 3064,2312.87 3064,2296 3080.79,2279.21 U1.38
  Top Layer w15: S1.1 2605,2610 2840,2610 2870,2580 R1.1 C17.1
VCC: C1.1 C2.1 C3.1 C6.1 C7.1 C8.1 C11.1 C14.1 C15.1 C16.1 C19.1 C21.1 C22.1 C25.1 C30.1 C32.1 IC1.2 IC1.4 R1.2 R2.2 R4.2 R7.2 R8.2 R10.2 R14.2 R18.2 SCL.1 U1.2 U1.11 U1.26 U1.37 U1.42 U1.54 U2.5 U3.5 U4.1 U4.20 U5.5 U6.5 VCC.1@2185,1846 VCC.3 | length 15227.1
  Top Layer w9: C11.1 3000,2115 3085.47,2200.47 U1.42 ; C16.1 2985,2505 3059,2431 3059,2344.74 3083,2320.74 3083,2307 3091.1,2298.9 U1.37 ; C14.1@3095,2650 3135,2610 3300,2610 3325.47,2584.53 U1.26 ; C6.1 3270,1815 3230,1855 3230,1885 3305.79,1960.79 U1.54 ; v1(3550,1930) 3555,1930 3592,1967 3592,2038.87 3635,2081.87 3635,2090 3622.95,2102.05 U1.2 ; U1.11 3632.66,2279.21 3661.87,2250 3720,2250 3733.5,2263.5 3733.5,2301.63 3772.98,2341.11 3818.44,2341.11 3844,2366.66 3844,2424 C7.1 3975,2555 4120,2555 4235,2440
  Top Layer w15: VCC.1@2185,1846 2224,1885 2315,1885 C32.1 ; IC1.2 IC1.4 2385,2082.8 C30.1 2297.2,1962.8 2375,1885 C32.1 ; v1(2505,1660) 2505,1754 R18.2 ; v1(2545,2205) 2515,2175 2515,2085 ; SCL.1 2576,1927 2515,1866 ; v1(2705,2475) 2705,2490 R1.2 ; v1(2905,2640) 2915,2650 C16.1 C14.1@3095,2650 ; C11.1 2840,2190 R7.2 R8.2 2620,2190 2515,2085 ; v1(3262.5,1657.5) 3255,1665 3255,1764.21 C6.1@3305.79,1815 ; C2.1 3595,1785 C3.1 ; v1(3620,1860) 3680,1800 C3.1 ; v1(3745,1650) 3786.73,1691.73 U6.5 3786.73,1723.27 3725,1785 C3.1 ; U3.5 3785.87,2094.13 3840,2040 4160,2040 C22.1 4330,1980 R10.2 4375,2025 v1(4415,2025) ; U2.5 3785.87,2299.13 3840,2245 4155,2245 C19.1 4270,2185 ; U5.5 3790,1870 3820,1840 4160,1840 C25.1 4330,1780 4330,1785 v1(4280,1835) ; v1(4270,2235) 4270,2185 ; v1(4285,2490) 4235,2440 4220,2425 C15.1 4330,2385 R2.2 ; R4.2 4270,2185 ; C8.1 4524,1785 VCC.3@4545,1806 ; C1.1 4508,2185 VCC.3@4545,2222 ; C32.1 2434,1825 R18.2 ; R18.2 2515,1866 ; 2515,1866 2515,2085 ; U4.1 3890,3180 v1(3940,3180) 4075,3180 C21.1 4146.89,3108.11 U4.20 U4.1
  Bottom Layer w15: VCC.1@2185,1846 VCC.1@2194,1855 ; v1(2505,1660) 2507.5,1657.5 3125,1657.5 ; v1(2545,2205) 2545,2315 2670,2440 ; SCL.1@2571,1955 SCL.1 ; v1(2705,2475) 2670,2440 ; v1(2905,2640) 2905,2455 2890,2440 2670,2440 ; v1(3262.5,1657.5) 3125,1657.5 ; v1(3550,1930) v1(3620,1860) ; v1(3745,1650) 3715,1620 ; v1(3940,3180) 3940,3170 4350,2760 4350,2490 ; v1(4270,2235) 4270,2410 4350,2490 ; v1(4280,1835) 4280,1780 ; v1(4285,2490) 4350,2490 ; v1(4415,2025) 4415,1915 4280,1780 ; VCC.3@4545,1806 4620,1731 ; VCC.3@4545,2222 4568,2222 4620,2170 ; 3125,1657.5 3162.5,1620 3715,1620 ; 3715,1620 4240,1620 ; 4240,1620 4540,1620 4620,1700 4620,1731 ; 4240,1620 4280,1660 4280,1780 ; 4350,2490 4590,2490 4620,2460 4620,2170 ; 4620,1731 4620,2170
VDDC: C4.1 C5.1 C12.1 C13.1 U1.25 U1.56 | length 1130.9
  Top Layer w9: C12.1@3305,2650 3345.16,2609.84 U1.25 U1.56 3345.16,1854.84 3400,1800 C4.1
  Top Layer w10: C13.1 C13.1@3208.82,2663.82 ; C12.1@3305,2650 C12.1
  Top Layer w15: C13.1@3208.82,2663.82 C12.1 ; C4.1 3482.26,1781.18 C5.1
pads on no net: Designator8.1 Designator9.1 Designator10.1 Designator11.1 Designator12.1 U1.5 U1.6 U1.7 U1.19 U1.20 U1.21 U1.22 U1.23 U1.24 U1.28 U1.29 U1.30 U1.31 U1.33 U1.36 U1.43 U1.44 U1.59 U1.60 U1.61 U1.62 U1.63 U1.64 U2.1 U3.1 U5.1 U6.1 U7.2 U7.3 U7.5

## Polygon pours and split planes (outlines as drawn)
GND on Top Layer "Bottom Layer-No Net" (solid, pour order 38): 4840,3235 2530,3235 2425,3130 2425,2480 2460,2445 2450,2435 2450,1555 4840,1555
GND on Top Layer "Bottom Layer-No Net" (solid, shelved, pour order 36): 2580,3245 2585,3240 4815,3240 4815,1560 4810,1555 2580,1555
GND on Bottom Layer "Bottom Layer-No Net" (solid, pour order 40): 4840,3240 2600,3240 2500,3140 2500,1625 2510,1625 2575,1560 2580,1565 4845,1565

## Keep-outs
Keep-Out Layer:
  lines w10: 1705,1555 4840,1555 4840,3240 3960,3240 1705,3240 1705,1555

## Other copper
Top Layer:
  region net NetC26_2: 1885,2100 1845,2100 1815,2055 1805,2020 1805,1995 1810,2005 1850,2005 1855,2010 1875,2030 1885,2030
  region net GND: 1885,2005 2055,2005 2055,1920 1885,1920
  region net VCC: 2395,1850 2440,1895 2565,1895 2500,1830 2500,1775 2515,1760 2515,1750 2500,1750 2490,1760 2450,1785 2380,1785 2380,1820 2375,1825
  region net VCC: 2250,1965 2345,1965 2385,1925 2385,1850 2365,1850 2365,1885 2340,1895
  region net VCC: 2325,2130 2445,2130 2335,2020 2255,2020 2250,2025 2325,2100
  region net VCC: 2405,2360 2405,2225 2415,2225 2445,2195 2390,2140 2320,2140 2320,2325 2355,2360
  region net 5V: 2325,2700 2355,2730 2355,2755 2540,2755 2585,2800 2625,2800 2625,2735 2605,2715 2365,2720 2345,2695 2330,2695
  region net 5V: 2225,2460 2225,2295 2175,2245 2125,2245 2135,2270 2125,2415 2135,2435 2235,2565
  region net 5V: 2285,2655 2345,2655 2335,2645 2335,2375 2315,2355 2245,2355 2220,2380 2225,2385 2225,2605 2280,2660 2285,2660
  region net 5V: 2365,2840 2315,2790 2315,2690 2285,2690 2245,2730 2245,2845
  region net 5V: 2000,3025 2060,3085 2295,3085 2370,3010 2370,2890 2010,2890 2000,2900
  region net NetC26_2: 1765,2235 1820,2235 1825,2230 1900,2285 1900,2435 1945,2495 2065,2495 2065,2610 2045,2630 1890,2630 1890,2520 1850,2480 1850,2314.69
  region net NetC26_2: 1796.25,2023.75 1796.25,2138.75 1816.25,2158.75 1816.25,2228.75 1751.25,2228.75 1738.75,2196.25 1751.25,2033.75
  text "Tiva Control" at 1945,3155 h40
  text "3Superman" at 1930,1585 h40

## Silkscreen, mask and mechanical layers (free items; w line width, h text height)
Top Overlay:
  text "RX" at 3465,3095 h40 r90
  text "TX" at 3365,3090 h40 r90
  text "3Superman" at 2720,3085 h40
  text "GND" at 3260,3080 h40 r90
  text "PWM1" at 4415,3075 h40 r90
  text "PWM2" at 4520,3075 h40 r90
  text "PWM3" at 4615,3070 h40 r90
  text "TEAM" at 2720,3010 h40
  text "GND" at 4655,2895 h40
  text "GND" at 2745,2830 h40 r90
  text "ENCA0" at 4615,2410 h40
  text "GND" at 2095,2340 h40 r90
  text "ENCB0" at 4615,2305 h40
  text "GND" at 4625,2100 h40
  text "VCC" at 2515,2015 h40
  text "GND" at 2645,2015 h40
  text "ENCA1" at 4615,1985 h40
  text "ENCB1" at 4615,1885 h40
  text "SDA" at 2835,1830 h40
  text "GND" at 2115,1675 h40 r90
  text "GND" at 4495,1590 h40
  text "PA0" at 2690,1570 h30 r90
  text "GND" at 2795,1570 h30 r90
  text "TDO" at 2885,1570 h30 r90
  text "TDI" at 2995,1570 h30 r90
  text "TCK" at 3195,1570 h30 r90
  text "TMS" at 3090,1565 h30 r90

## Text inside footprints (layer, text, board x,y; h text height)
Designator12: Top Overlay "PIF" at 2618.43,2954.47 h37.5